# Altium PCB PAYLOAD Subsystem.PcbDoc
Units mm, origin at the board's own origin, x right, y up, seen from the top; angles counter-clockwise.
Board outline 95.45 x 90.3 mm, 4 copper layers (Top Layer, Ground, Power, Bottom Layer), stack 1.641 mm thick; 7 components, 32 nets, 88 pads, 8 vias.
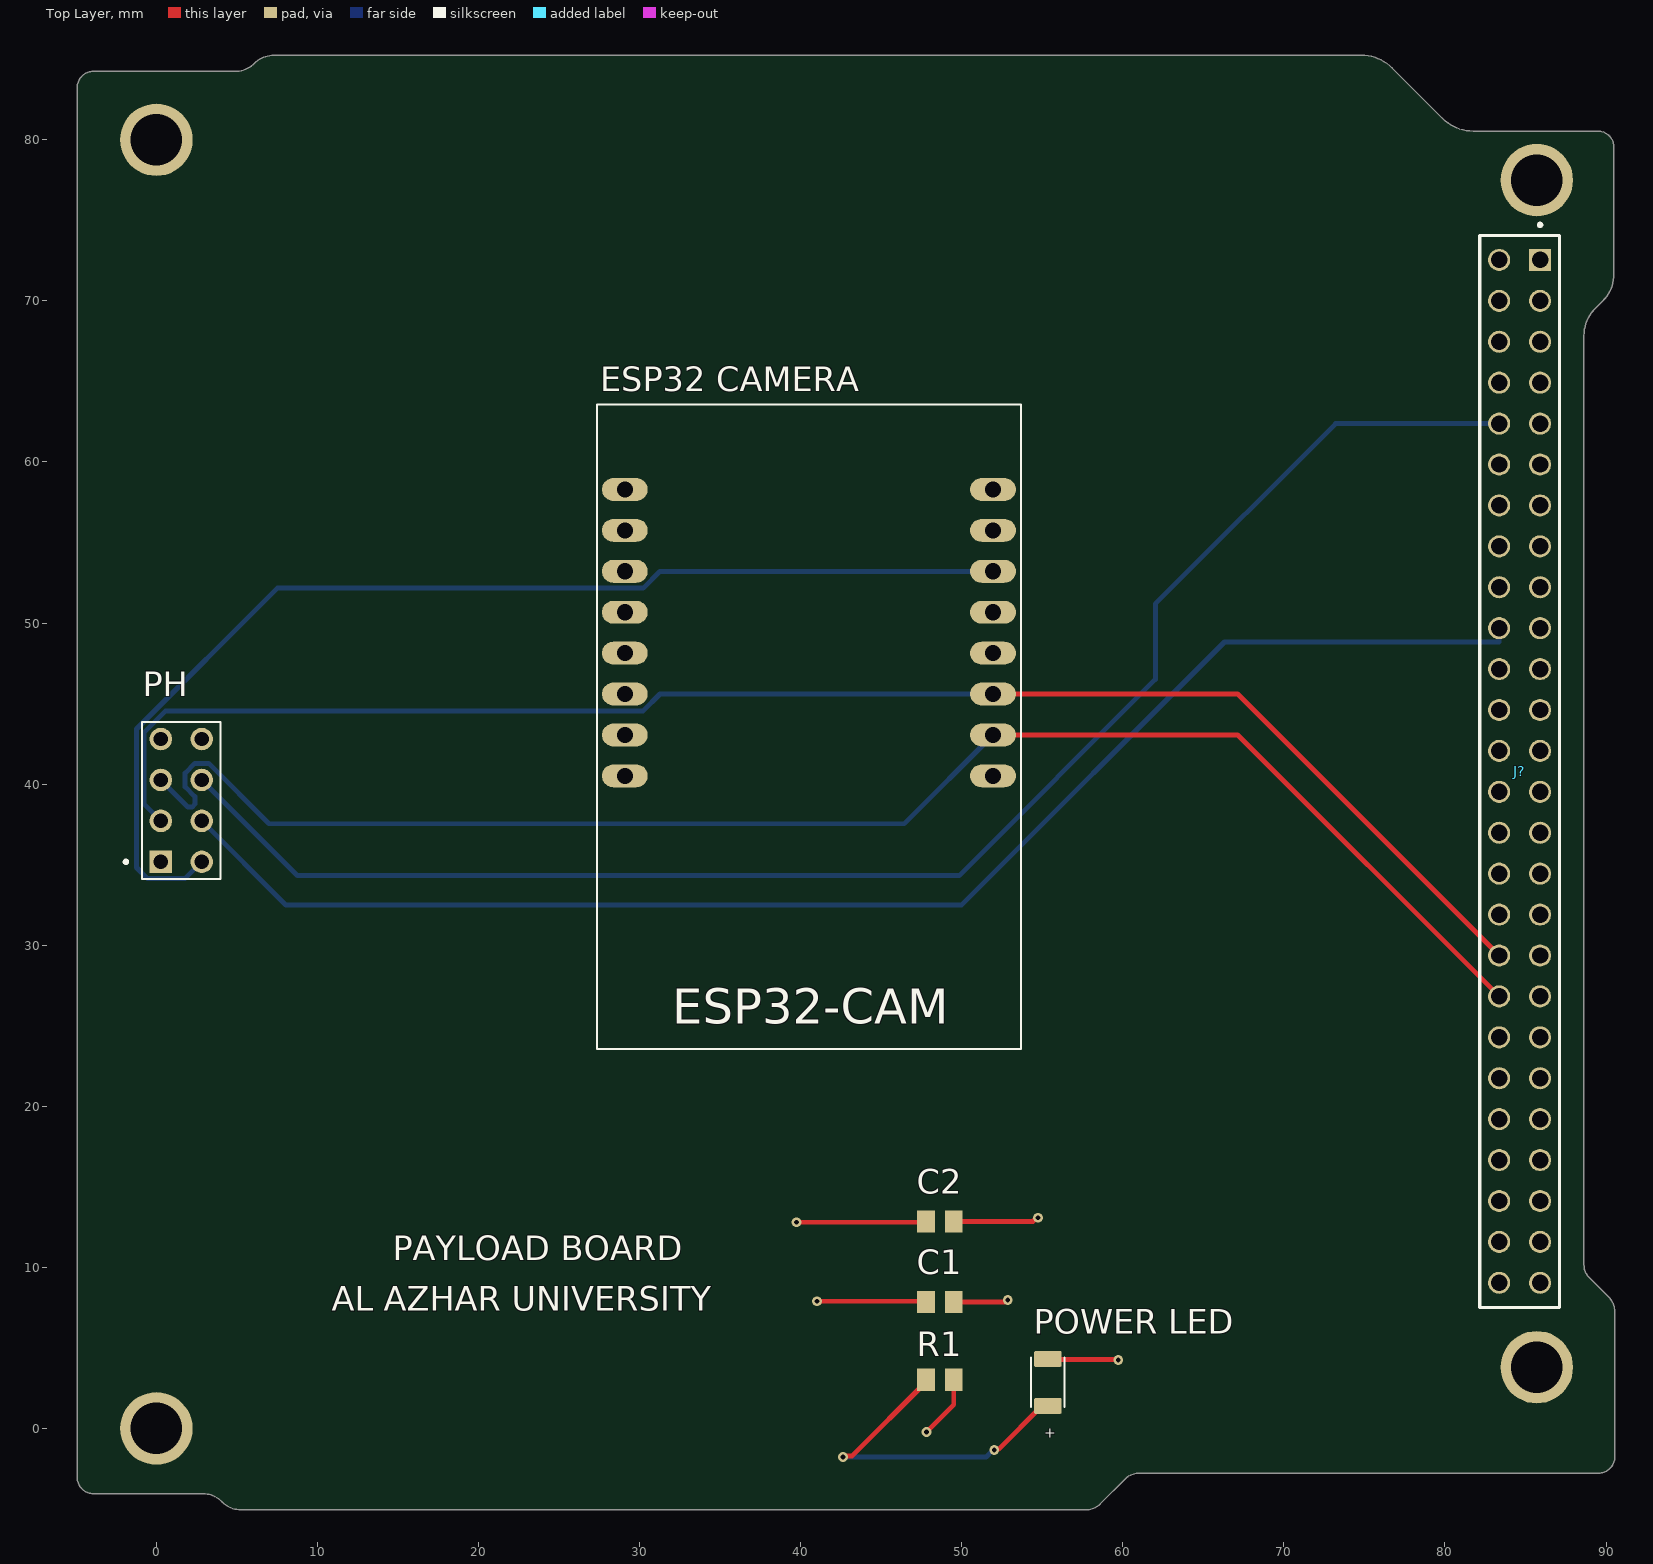
[diagram p0: Top Layer view]
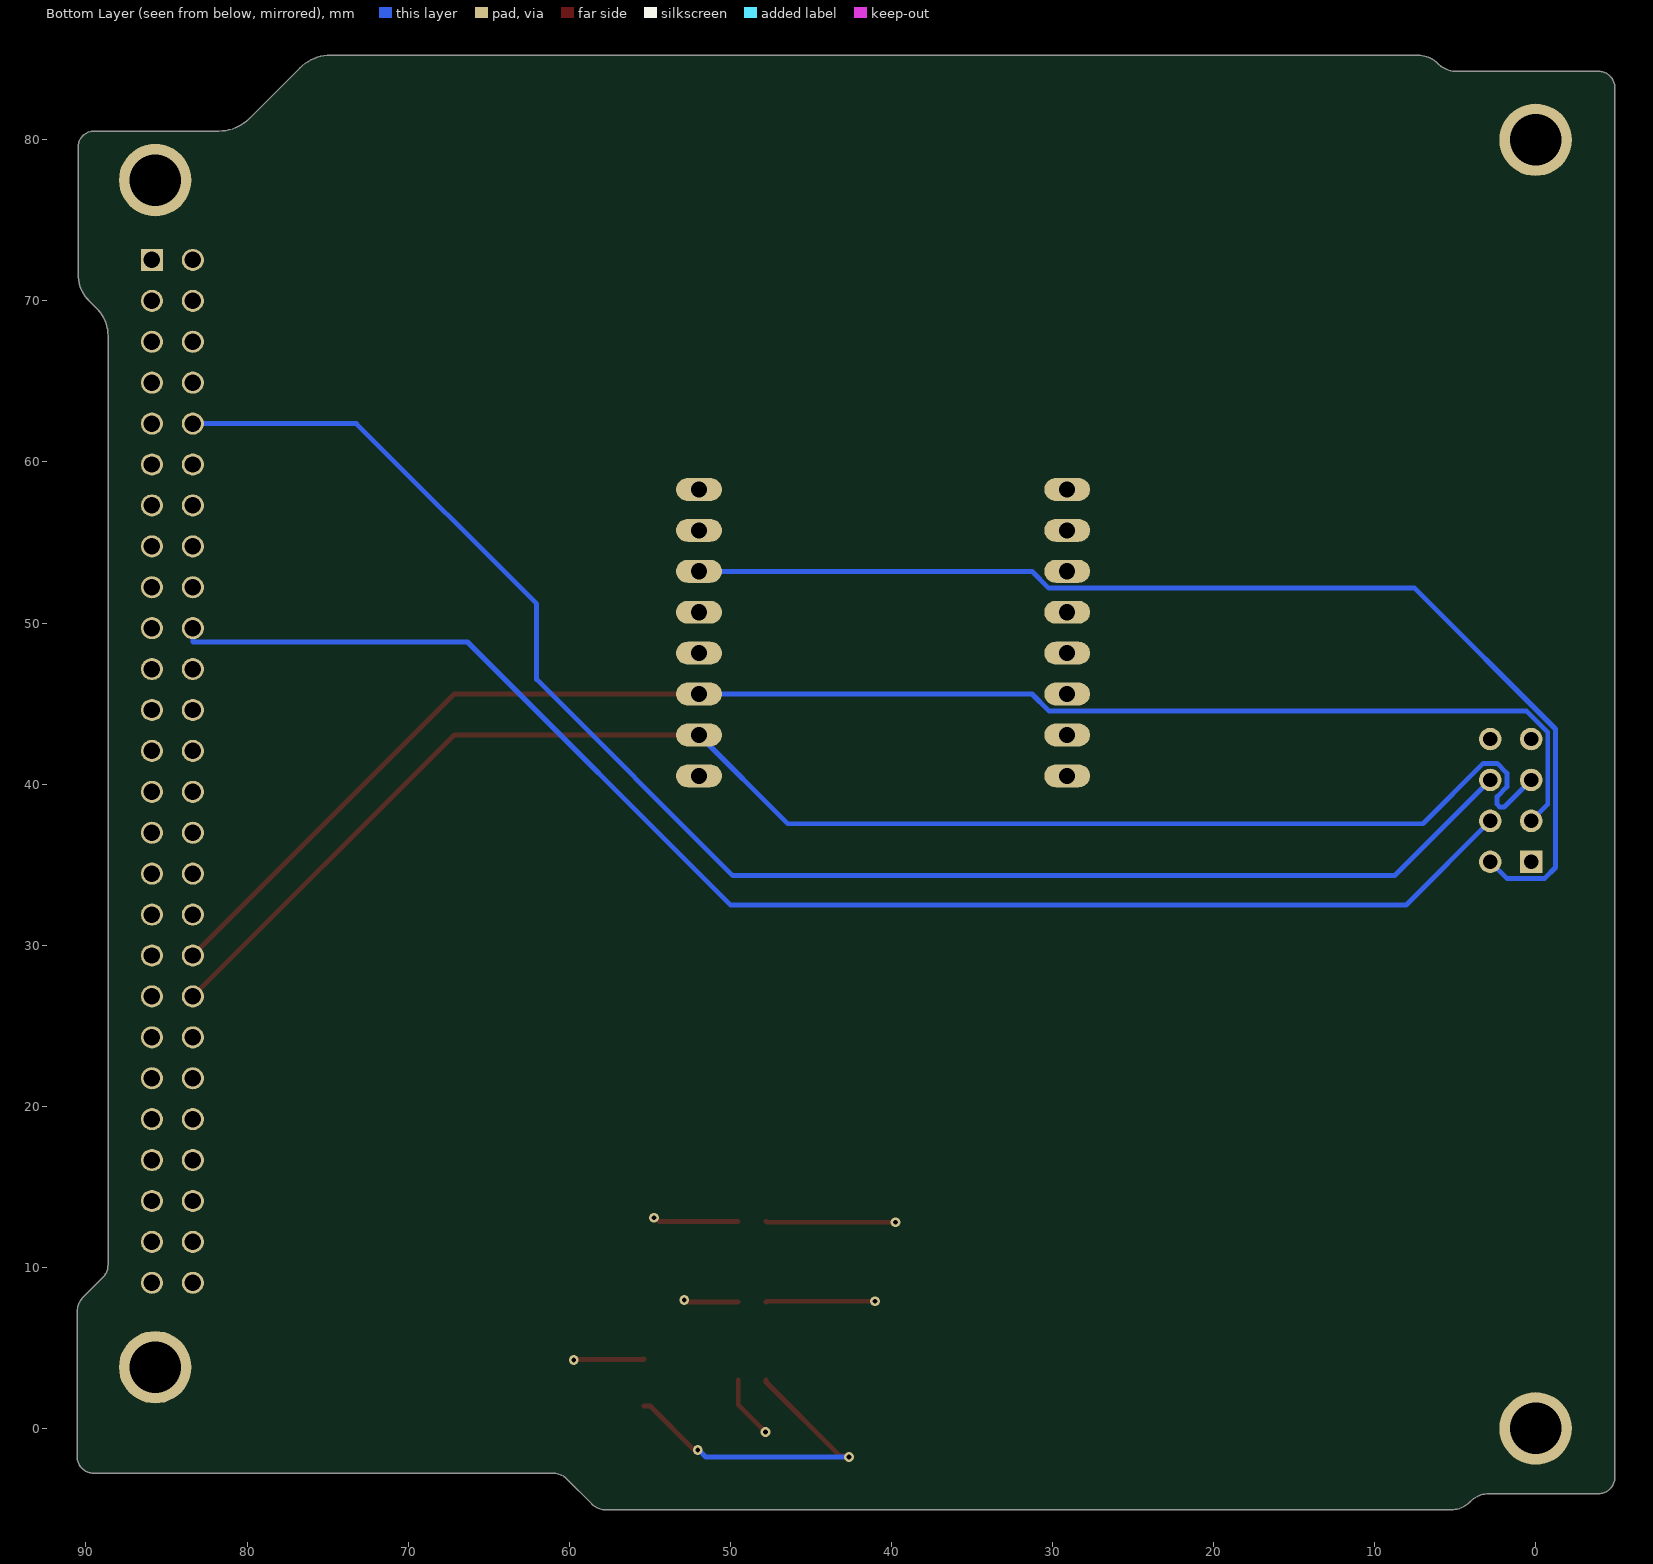
[diagram p1: Bottom Layer view, seen from below]
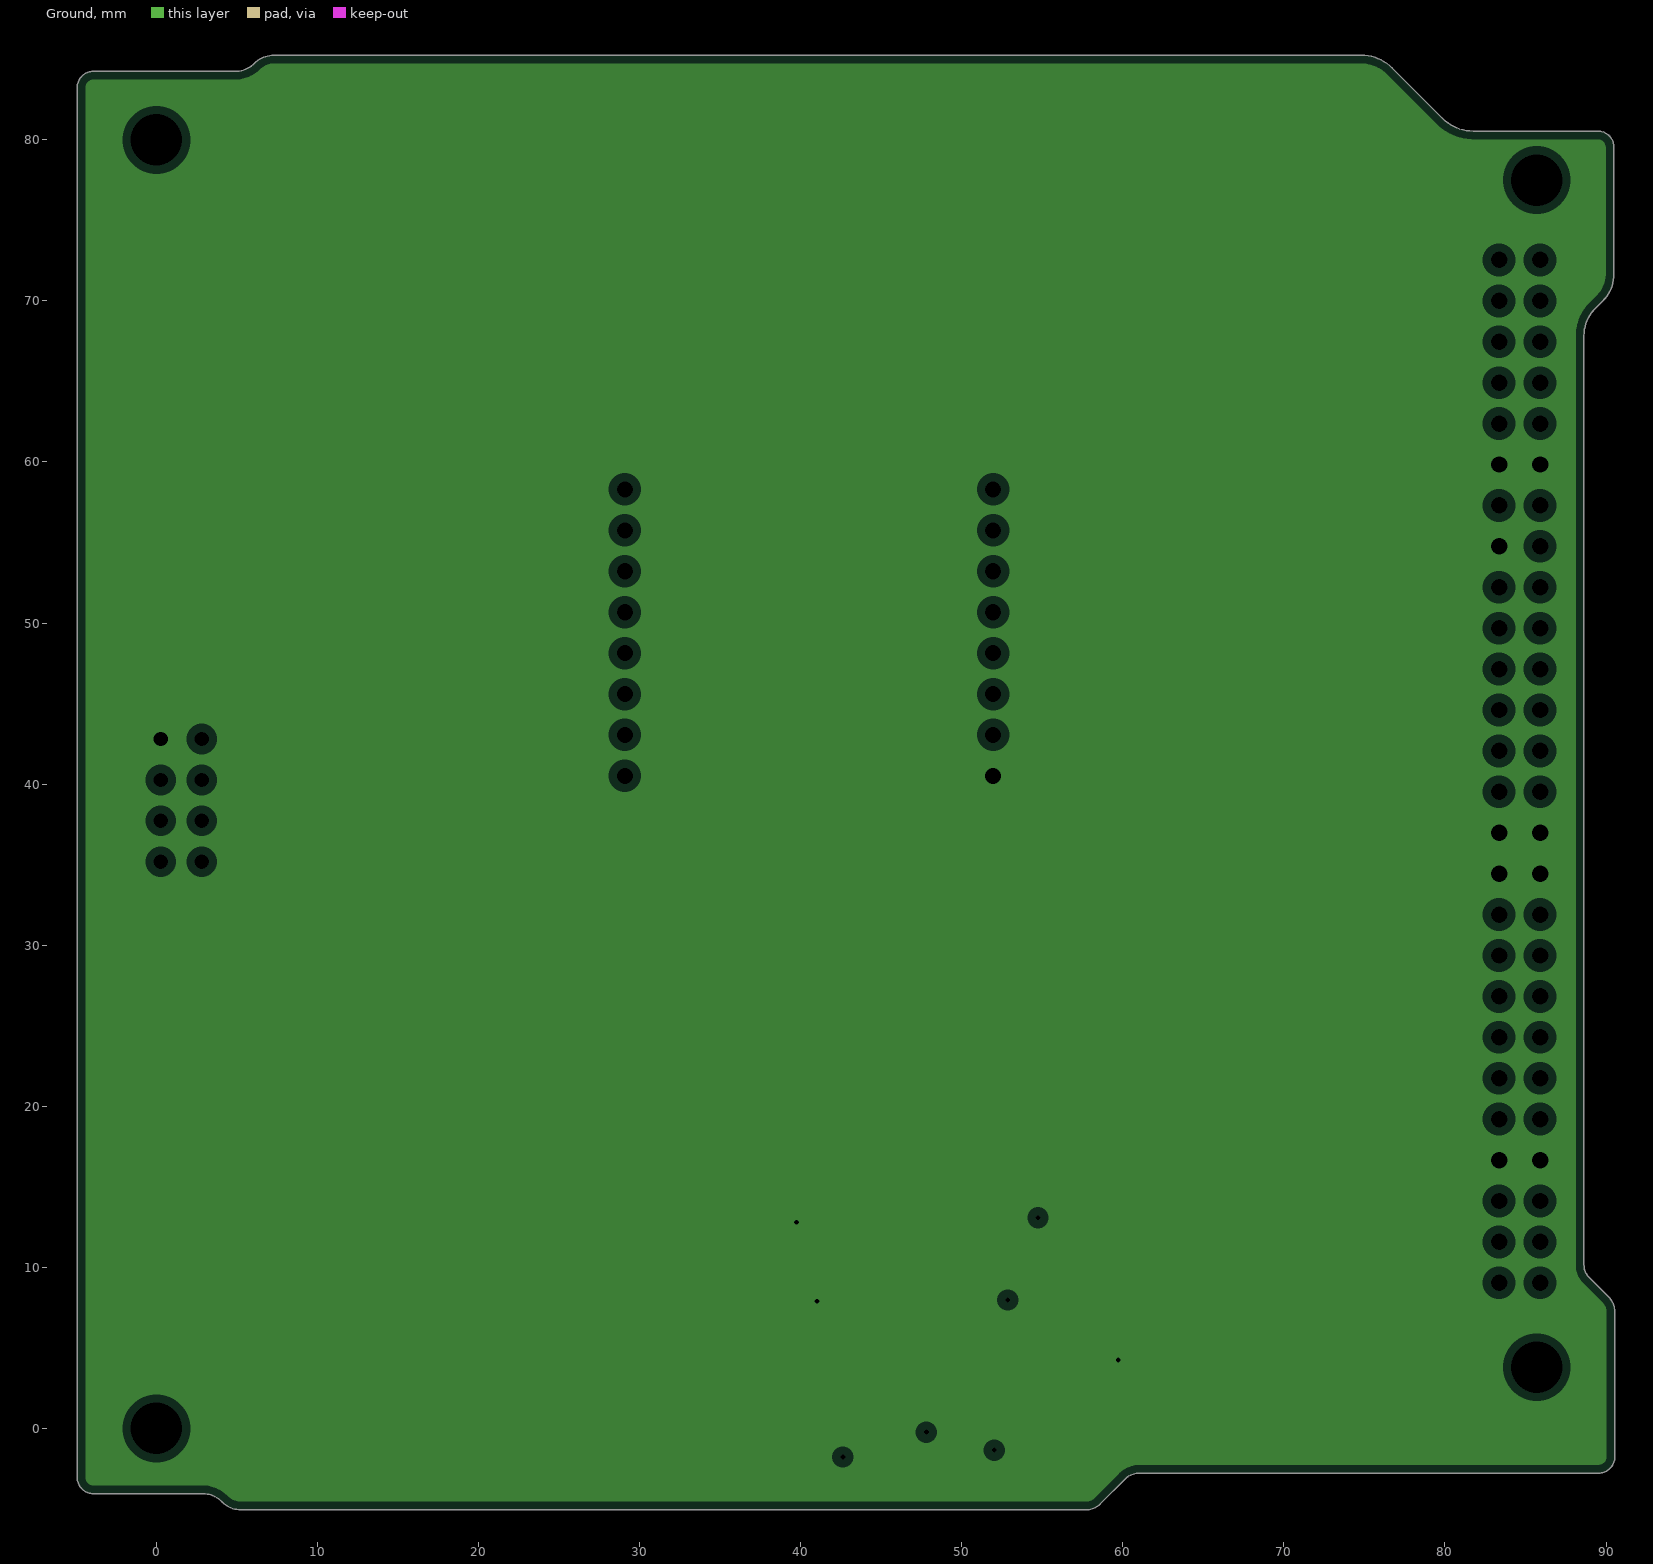
[diagram p2: Ground, clearances drawn from the general rule]
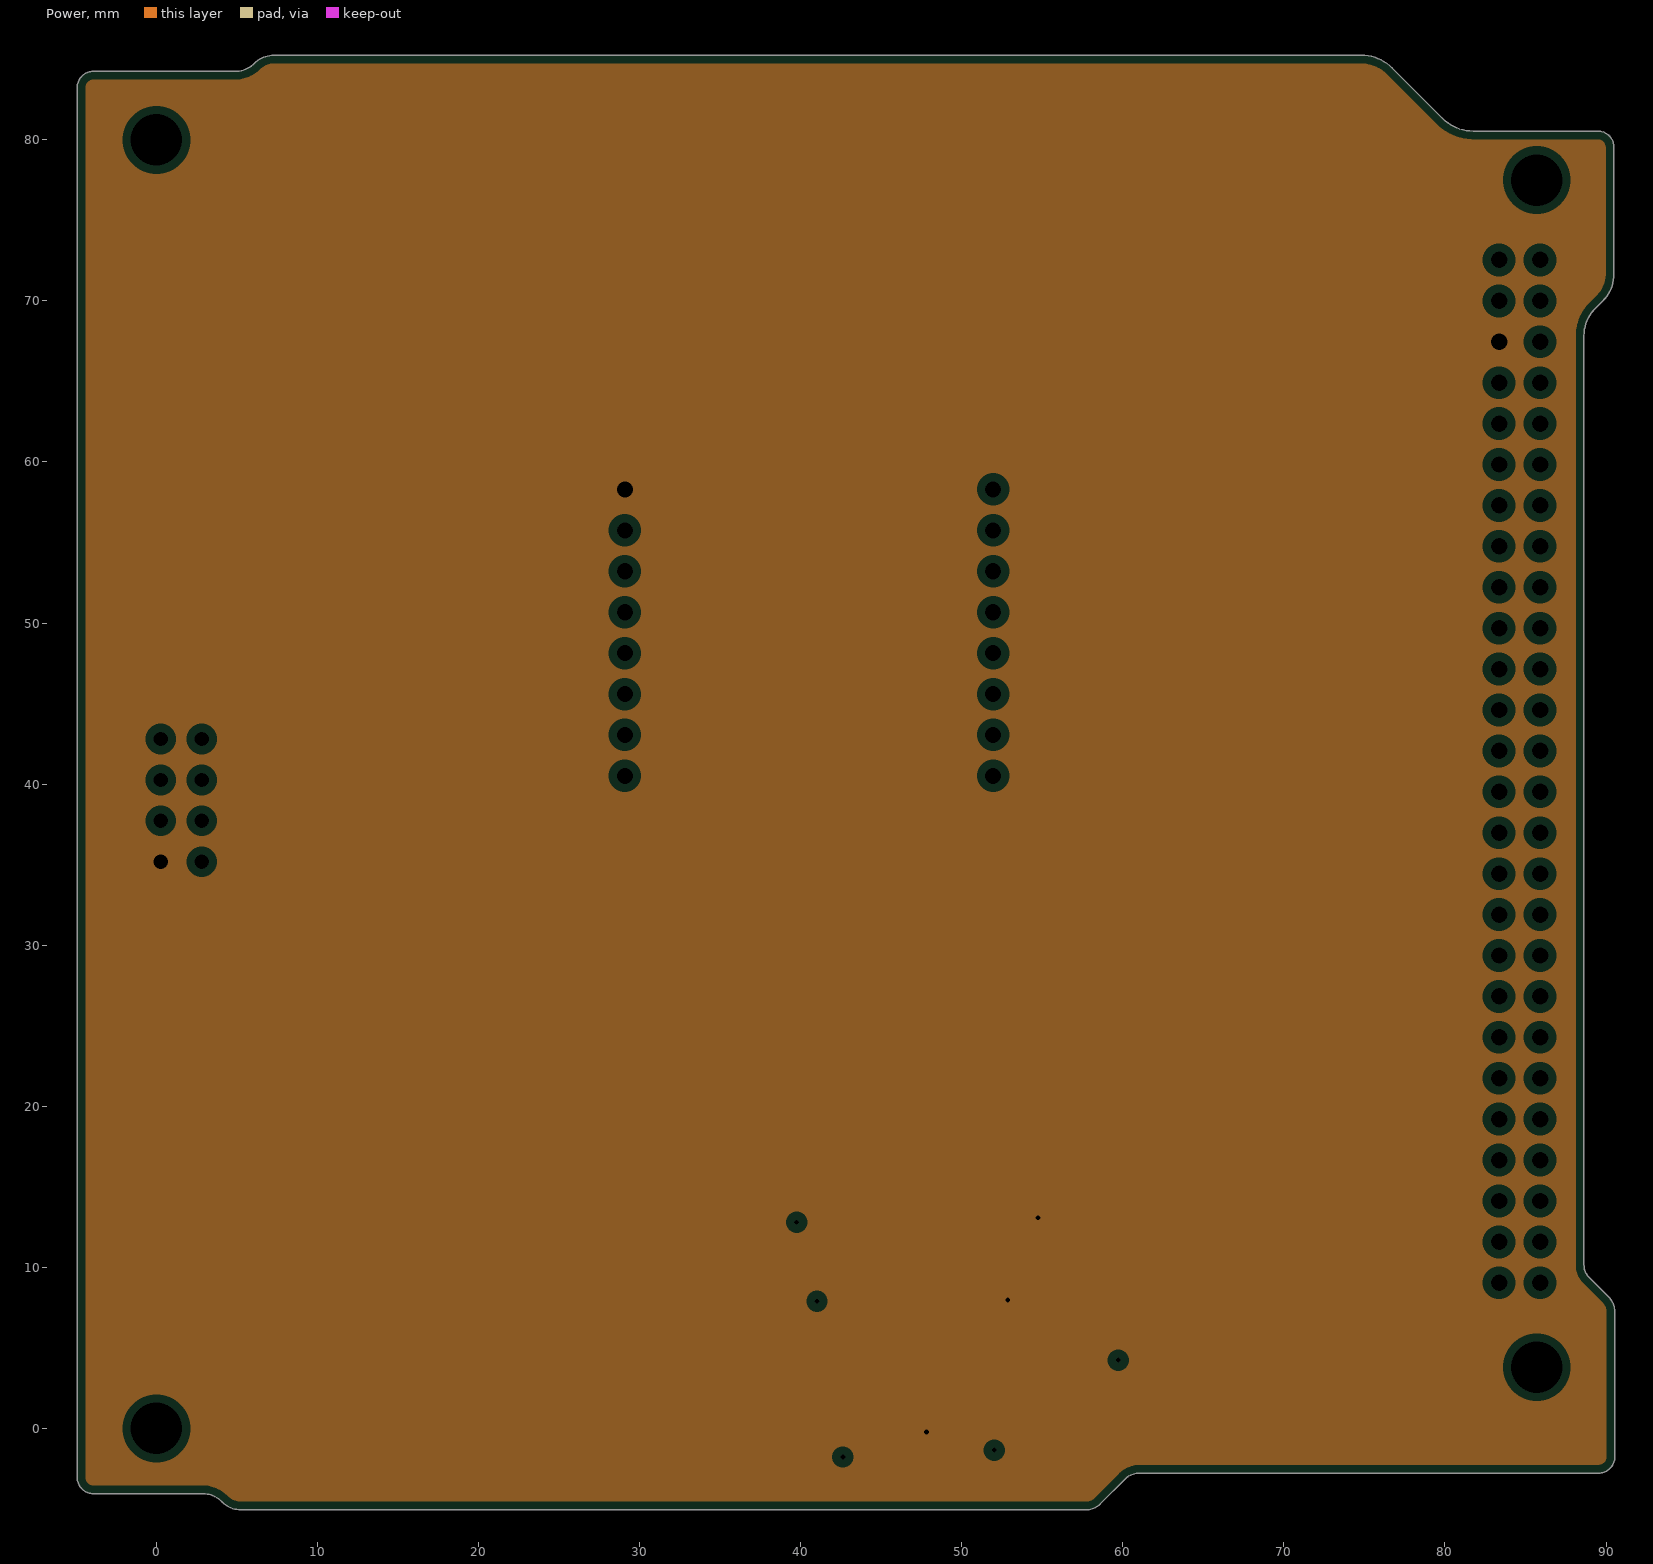
[diagram p3: Power, clearances drawn from the general rule]

## Layer stack, top to bottom
Top Solder: solder mask 0.0102, Solder Resist, Dk 3.5
Top Layer: signal copper 0.0356
Dielectric 1: prepreg 0.1702, FR-4, Dk 4.35
Ground: plane copper 0.0178, net G
Dielectric 3: core 1.1938, FR-4, Dk 4.35
Power: plane copper 0.0178, net 5V(CAMERA)
Dielectric 2: prepreg 0.1702, FR-4, Dk 4.35
Bottom Layer: signal copper 0.0356
Bottom Solder: solder mask 0.0102, Solder Resist, Dk 3.5

## Board outline
2.9,-4.05 cw(c2.9,-5.668) 4.044,-4.524 4.096,-4.576 ccw(c5.24,-3.432) 5.24,-5.05 57.73,-5.05 ccw(c57.73,-3.831) 58.592,-4.693 60.158,-3.127 cw(c61.02,-3.989) 61.02,-2.77 89.54,-2.77 ccw(c89.54,-1.77) 90.54,-1.77 90.54,7.25 ccw(c89.248,7.25) 90.162,8.163 89.625,8.7 88.952,9.373 cw(c89.728,10.15) 88.63,10.15 88.63,67.85 cw(c90.996,67.85) 89.323,69.523 89.797,69.997 ccw(c88.124,71.67) 90.49,71.67 90.49,79.54 ccw(c89.49,79.54) 89.49,80.54 81.75,80.54 cw(c81.75,83.22) 79.855,81.325 76.715,84.465 ccw(c74.82,82.57) 74.82,85.25 7.302,85.25 ccw(c7.302,83.543) 6.095,84.75 cw(c4.888,85.957) 4.888,84.25 -3.91,84.25 ccw(c-3.91,83.25) -4.91,83.25 -4.91,-3.05 ccw(c-3.91,-3.05) -3.91,-4.05

## Design rules (kind name [scope] priority, off if disabled: settings)
Clearance [All] p1: gap=0.178 ignorepadtopadclearanceinfootprint=FALSE except(0: Arc-Hole Track-Hole SMDPad-Hole THPad-Hole Via-Hole Fill-Hole Poly-Hole Region-Hole Text-Hole)
ComponentClearance [All] p1: gap=0.762 collisioncheckmode=3 verticalgap=0.762 showdistances=FALSE
DiffPairsRouting [All] p1: maxlimit=0.254 minlimit=0.254 mostfreqgap=0.254 toplayer_minwidth=0.381 toplayer_maxwidth=0.381 toplayer_prefwidth=0.381 bottomlayer_minwidth=0.381 bottomlayer_maxwidth=0.381 bottomlayer_prefwidth=0.381 substack1={0761D619-B0FF-4D42-81BD-1B94FE1A46B2} toplayer_{0761d619-b0ff-4d42-81bd-1b94fe1a46b2}_minwidth=0.381 toplayer_{0761d619-b0ff-4d42-81bd-1b94fe1a46b2}_maxwidth=0.381 toplayer_{0761d619-b0ff-4d42-81bd-1b94fe1a46b2}_prefwidth=0.381 bottomlayer_{0761d619-b0ff-4d42-81bd-1b94fe1a46b2}_minwidth=0.381 bottomlayer_{0761d619-b0ff-4d42-81bd-1b94fe1a46b2}_maxwidth=0.381 bottomlayer_{0761d619-b0ff-4d42-81bd-1b94fe1a46b2}_prefwidth=0.381 maxuncoupledlength=12.7
HoleSize [All] p1: absolutevalues=TRUE maxlimit=3.302 minlimit=0.025 maxpercent=80.000 minpercent=20.000
MinimumSolderMaskSliver [All] p1: minsoldermaskwidth=0.076
PlaneClearance [All] p1: clearance=0.508
PlaneConnect [All] p1: planeconnectstyle=Relief reliefexpansion=0.508 reliefentries=4 reliefconductorwidth=0.254 reliefairgap=0.254
PolygonConnect [All] p1: connectstyle=Relief reliefconductorwidth=0.254 reliefentries=4 polygonreliefangle="90 Angle" airgapwidth=0.254
RoutingVias [All] p1: holewidth=0.305 width=0.61 viastyle="Through Hole" minholewidth=0.254 minwidth=0.254 maxholewidth=0.305 maxwidth=0.61
SilkToSilkClearance [All] p1: silktosilkclearance=0.102
SilkToSolderMaskClearance [IsText] p1: minsilkscreentomaskgap=0.102 clearancetoexposedcopper=TRUE
SolderMaskExpansion [All] p1: expansion=0.076 istentingtop=FALSE
Width [All] p1: maxlimit=1.016 minlimit=0.254 preferedwidth=0.305 substack1={0761D619-B0FF-4D42-81BD-1B94FE1A46B2} toplayer_{0761d619-b0ff-4d42-81bd-1b94fe1a46b2}_minwidth=0.178 bottomlayer_{0761d619-b0ff-4d42-81bd-1b94fe1a46b2}_minwidth=0.178 minimp=50.000000 maximp=50.000000 favimp=50.000000
22 further rules are at their usual default settings.

## Components (designator, comment, footprint, x,y, rotation, side; value= is the part's Value field where it differs from the comment)
C1 "10uf" CAPC2012X95N 48.641,7.849 r0 top
C2 "0.1uf" CAPC2012X95N 48.641,12.852 r0 top
"ESP32 CAMERA" "ESP32-CAM" ESP32-CAM 40.513,48.133 r0 top
J? "ESQ-126-39-G-D" SAMTEC_ESQ-126-39-G-D 85.903,72.542 r90 top locked
PH "5-146256-4" TE_5-146256-4 1.549,38.989 r90 top
"POWER LED" "BLUE-LED" RESC3015X65 55.347,2.867 r90 top
R1 "330" CAPC2012X95N 48.641,3.023 r0 top

## Footprints (in the part's own frame and the unit in brackets; to place one, negate y for a bottom-side part, rotate by r counter-clockwise, add the part's x,y. Pads: shape width x height; smd on the part's side, far side on the other; paste and mask are expansions set on the pad)
CAPC2012X95N [mm]
  rect 1.1x1.38 smd: 1(-0.863,0) 2(0.863,0)
ESP32-CAM [mil]
  oval 112x56 hole 39.37: P$1(-450,400) P$2(-450,300) P$3(-450,200) P$4(-450,100) P$5(-450,0) P$6(-450,-100) P$7(-450,-200) P$8(-450,-300) P$9(450,-300) P$10(450,-200) P$11(450,-100) P$12(450,0) P$13(450,100) P$14(450,200) P$15(450,300) P$16(450,400)
  silkscreen extent -518,-967 518,607
RESC3015X65 [mm]
  rrect20% 0.98x1.72 smd: 1(-1.47,0) 2(1.45,0)
  silkscreen extent -1.53,-1.04 1.53,1.04
SAMTEC_ESQ-126-39-G-D [mm]
  rect 1.37x1.37 hole 1.02: 01(0,0)
  round 1.37 hole 1.02: 02(0,2.54) 03(-2.54,0) 04(-2.54,2.54) 05(-5.08,0) 06(-5.08,2.54) 07(-7.62,0) 08(-7.62,2.54) 09(-10.16,0) 10(-10.16,2.54) 11(-12.7,0) 12(-12.7,2.54) 13(-15.24,0) 14(-15.24,2.54) 15(-17.78,0) 16(-17.78,2.54) 17(-20.32,0) 18(-20.32,2.54) 19(-22.86,0) 20(-22.86,2.54) 21(-25.4,0) 22(-25.4,2.54) 23(-27.94,0) 24(-27.94,2.54) 25(-30.48,0) 26(-30.48,2.54) 27(-33.02,0) 28(-33.02,2.54) 29(-35.56,0) 30(-35.56,2.54) 31(-38.1,0) 32(-38.1,2.54) 33(-40.64,0) 34(-40.64,2.54) 35(-43.18,0) 36(-43.18,2.54) 37(-45.72,0) 38(-45.72,2.54) 39(-48.26,0) 40(-48.26,2.54) 41(-50.8,0) 42(-50.8,2.54) 43(-53.34,0) 44(-53.34,2.54) 45(-55.88,0) 46(-55.88,2.54) 47(-58.42,0) 48(-58.42,2.54) 49(-60.96,0) 50(-60.96,2.54) 51(-63.5,0) 52(-63.5,2.54)
  silkscreen extent -65.02,-1.21 2.27,3.74
TE_5-146256-4 [mil]
  rect 55.04x55.04 hole 35.04: 1(-150,50)
  round 55.04 hole 35.04: 2(-50,50) 3(50,50) 4(150,50) 5(-150,-50) 6(-50,-50) 7(50,-50) 8(150,-50)
  silkscreen extent -192,-96 192,139

## Part data
C1 C2: library part UMK212SD103KD-T, "CAP CER 10000PF 50V 0805", Package=None, Availability=Unavailable, MP=UMK212SD103KD-T, Price=None
"ESP32 CAMERA": "The smallest 802.11b/g/n Wi-Fi BT SoC Module", Package=Package, Availability="No availability data", Check_prices=https://www.snapeda.com/parts/ESP32-CAM/AI-Thinker/view-part/5507632/?ref=eda, MF=AI-Thinker, MP=ESP32-CAM, Price=None, SnapEDA_Link=https://www.snapeda.com/parts/ESP32-CAM/AI-Thinker/view-part/5507632/?ref=snap
J?: "52 Position Elevated Socket Connector Through Hole", Package=None, Availability=Unavailable, MF=Samtec, MP=ESQ-126-39-G-D, Price=None, SnapEDA_Link=https://www.snapeda.com/parts/ESQ-126-39-G-D/Samtec%20Inc./view-part/490181/?ref=snap
PH: "08 MODII HDR DRST B/A .100CL LF", Package=None, Availability=Unavailable, MF="TE Connectivity", MP=5-146256-4, Price=None, SnapEDA_Link=https://www.snapeda.com/parts/5-146256-4/TE%20Connectivity%20AMP%20Connectors/view-part/500529/?ref=snap
"POWER LED": library part LTST-C150TBKT, "LED Blue 470nm LED Indication 3.3V"
R1: library part RESISTOR

## Free pads (board coordinates)
  round 4.5 hole 3.2 unplated: 1(0,0) 2(0,80) 3(85.7,77.5) 4(85.7,3.8)

## Via types
v1: diameter 0.61, hole 0.305, Top Layer to Bottom Layer, 8 vias

## Nets (pads, with @x,y where several pads share a name; then routed paths per layer and width w, separated by ;. In a path a pad name is that pad's centre, name@x,y a point inside that pad or via, vN(x,y) a via of type N, cw(c..) or ccw(c..) an arc to the next point about the centre after c; other vN are vias at no path point)
3.3V: J?.10 PH.7 | length 97.4
  Bottom Layer w0.305: PH.7 8.763,34.315 49.835,34.315 62.02,46.501 62.02,51.187 73.216,62.382 J?.10
"3.3V (ADCS)": J?.28
"3.3V (COMM)": J?.18
"3.3V (OBC)": J?.22
5V: J?.20 PH.6 | length 90.3
  Bottom Layer w0.305: PH.6 8.052,32.487 49.975,32.487 66.312,48.823 83.363,48.823 J?.20
"5V (EPS)": J?.08
5V(CAMERA): "ESP32 CAMERA.P$1" C1.2 C2.2 J?.06 PH.1 R1.2 | length 12.7
  Top Layer w0.305: v1(47.803,-0.229) 49.504,1.473 R1.2 ; C1.2 52.648,7.849 52.775,7.976 v1(52.857,7.976) ; C2.2 54.426,12.852 54.655,13.081 v1(54.737,13.081)
"E-RST Hard Reset": J?.42
"Forwarding Pin": J?.05
G: "ESP32 CAMERA.P$9" "POWER LED.2" C1.1 C2.1 J?.11 J?.12 J?.16 J?.29 J?.30 J?.31 J?.32 J?.45 J?.46 PH.4 | length 19.2
  Top Layer w0.305: v1(39.751,12.802) 47.727,12.802 C2.1 ; v1(41.021,7.899) 47.727,7.899 C1.1 ; 55.347,4.317 55.384,4.279 59.678,4.279 v1(59.715,4.242)
IO0: "ESP32 CAMERA.P$14" PH.5 | length 70.6
  Bottom Layer w0.305: PH.5 1.79,34.15 -0.556,34.15 -1.232,34.826 -1.232,43.425 7.514,52.172 30.226,52.172 31.267,53.213 51.943,53.213
NetLabel36: J?.51
NetLabel54: J?.52
"NetPOWER LED_1": "POWER LED.1" R1.1 | length 21.3
  Top Layer w0.305: v1(42.621,-1.778) 42.68,-1.72 43.176,-1.72 47.778,2.883 R1.1 ; v1(52.019,-1.346) 52.078,-1.288 52.292,-1.288 54.977,1.397 55.347,1.397
  Bottom Layer w0.305: v1(42.621,-1.778) 51.505,-1.778 51.937,-1.346 v1(52.019,-1.346)
"RD + (OBC-ADCS)": J?.21
"RD + (OBC-COMM)": J?.41
"RD + (OBC-EPS)": J?.01
"RD - (OBC-ADCS)": J?.19
"RD - (OBC-COMM)": J?.39
"RD - (OBC-EPS)": J?.02
"RST Soft-Reset": J?.25
"Solar Array Input": J?.24
"TD + (OBC-ADCS)": J?.17
"TD + (OBC-COMM)": J?.37
"TD + (OBC-EPS)": J?.03
"TD - (OBC-ADCS)": J?.15
"TD - (OBC-COMM)": J?.35
"TD - (OBC-EPS)": J?.04
"UART-Rx (OBC-CAMERA)": "ESP32 CAMERA.P$10" J?.38 PH.3 | length 97.5
  Top Layer w0.305: 51.943,43.053 67.132,43.053 J?.38
  Bottom Layer w0.305: PH.3 1.965,38.573 2.218,38.573 2.396,38.752 2.396,39.226 1.79,39.833 1.79,40.685 2.393,41.288 3.246,41.288 6.993,37.541 46.431,37.541 51.943,43.053
"UART-Tx (OBC -CAMERA)": "ESP32 CAMERA.P$11" J?.36 PH.2 | length 97.7
  Top Layer w0.305: 51.943,45.593 67.132,45.593 J?.36
  Bottom Layer w0.305: PH.2 -0.75,38.748 -0.75,43.225 0.577,44.552 30.226,44.552 31.267,45.593 51.943,45.593
VBAT+: J?.49
VBAT-: J?.50
pads on no net: "ESP32 CAMERA.P$2" "ESP32 CAMERA.P$3" "ESP32 CAMERA.P$4" "ESP32 CAMERA.P$5" "ESP32 CAMERA.P$6" "ESP32 CAMERA.P$7" "ESP32 CAMERA.P$8" "ESP32 CAMERA.P$12" "ESP32 CAMERA.P$13" "ESP32 CAMERA.P$15" "ESP32 CAMERA.P$16" J?.07 J?.09 J?.13 J?.14 J?.23 J?.26 J?.27 J?.33 J?.34 J?.40 J?.43 J?.44 J?.47 J?.48 PH.8

## Polygon pours and split planes (outlines as drawn)
G on Ground (split plane): 175 vertices, not listed, extent -4.401,-4.541 90.031,84.741
5V(CAMERA) on Power (split plane): 175 vertices, not listed, extent -4.401,-4.541 90.031,84.741

## Silkscreen, mask and mechanical layers (free items; w line width, h text height)
Top Overlay:
  text "PAYLOAD BOARD" at 14.681,10.439 h1.52
  text "AL AZHAR UNIVERSITY" at 10.897,7.315 h1.52
  text "+" at 55.118,-0.563 h0.64
Mechanical 1:
  lines w0.254: -4.91,-3.05 ccw(c-3.91,-3.05) -3.91,-4.05 2.9,-4.05 cw(c2.9,-5.668) 4.044,-4.524 4.096,-4.576 ccw(c5.24,-3.432) 5.24,-5.05 57.73,-5.05 ccw(c57.73,-3.831) 58.592,-4.693 60.158,-3.127 cw(c61.02,-3.989) 61.02,-2.77 89.54,-2.77 ccw(c89.54,-1.77) 90.54,-1.77 90.54,7.25 ccw(c89.248,7.25) 90.162,8.163 89.625,8.7 88.952,9.373 cw(c89.728,10.15) 88.63,10.15 88.63,67.85 cw(c90.996,67.85) 89.323,69.523 89.797,69.997 ccw(c88.124,71.67) 90.49,71.67 90.49,79.54 ccw(c89.49,79.54) 89.49,80.54 81.75,80.54 cw(c81.75,83.22) 79.855,81.325 76.715,84.465 ccw(c74.82,82.57) 74.82,85.25 7.44,85.25 7.302,85.25 ccw(c7.302,83.543) 6.095,84.75 cw(c4.888,85.957) 4.888,84.25 4.75,84.25 -3.91,84.25 ccw(c-3.91,83.25) -4.91,83.25 -4.91,-3.05